# Altium PCB 2016ship.PcbDoc
Units mil, origin at the board's own origin, x right, y up, seen from the top; angles counter-clockwise.
Board outline 3217.54 x 3217.54 mil, 2 copper layers (Top Layer, Bottom Layer); 88 components, 45 nets, 223 pads, 58 vias.
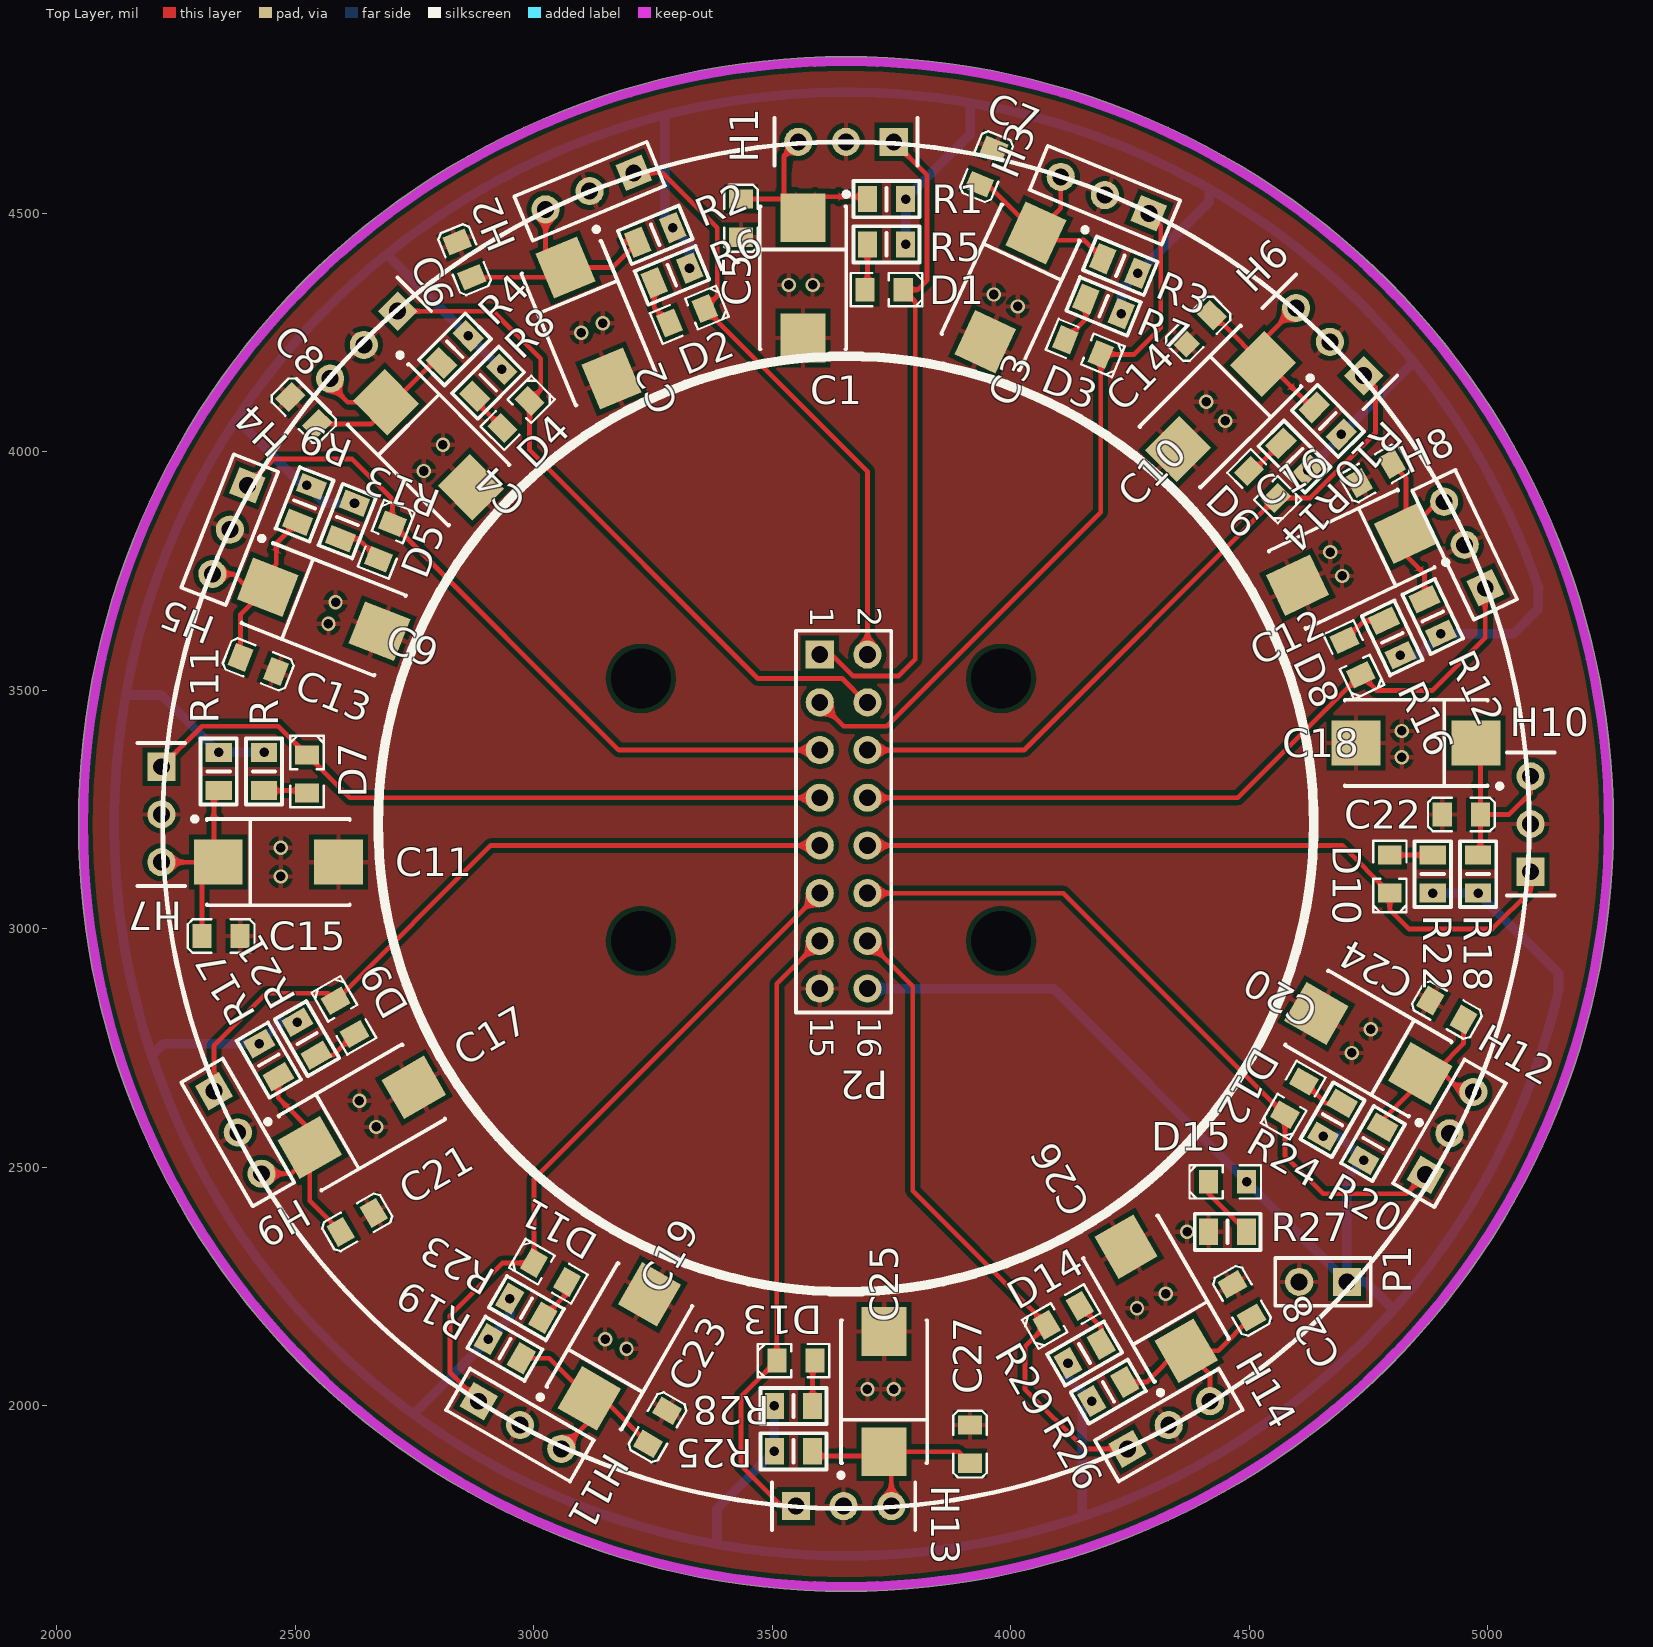
[diagram p0: Top Layer view]
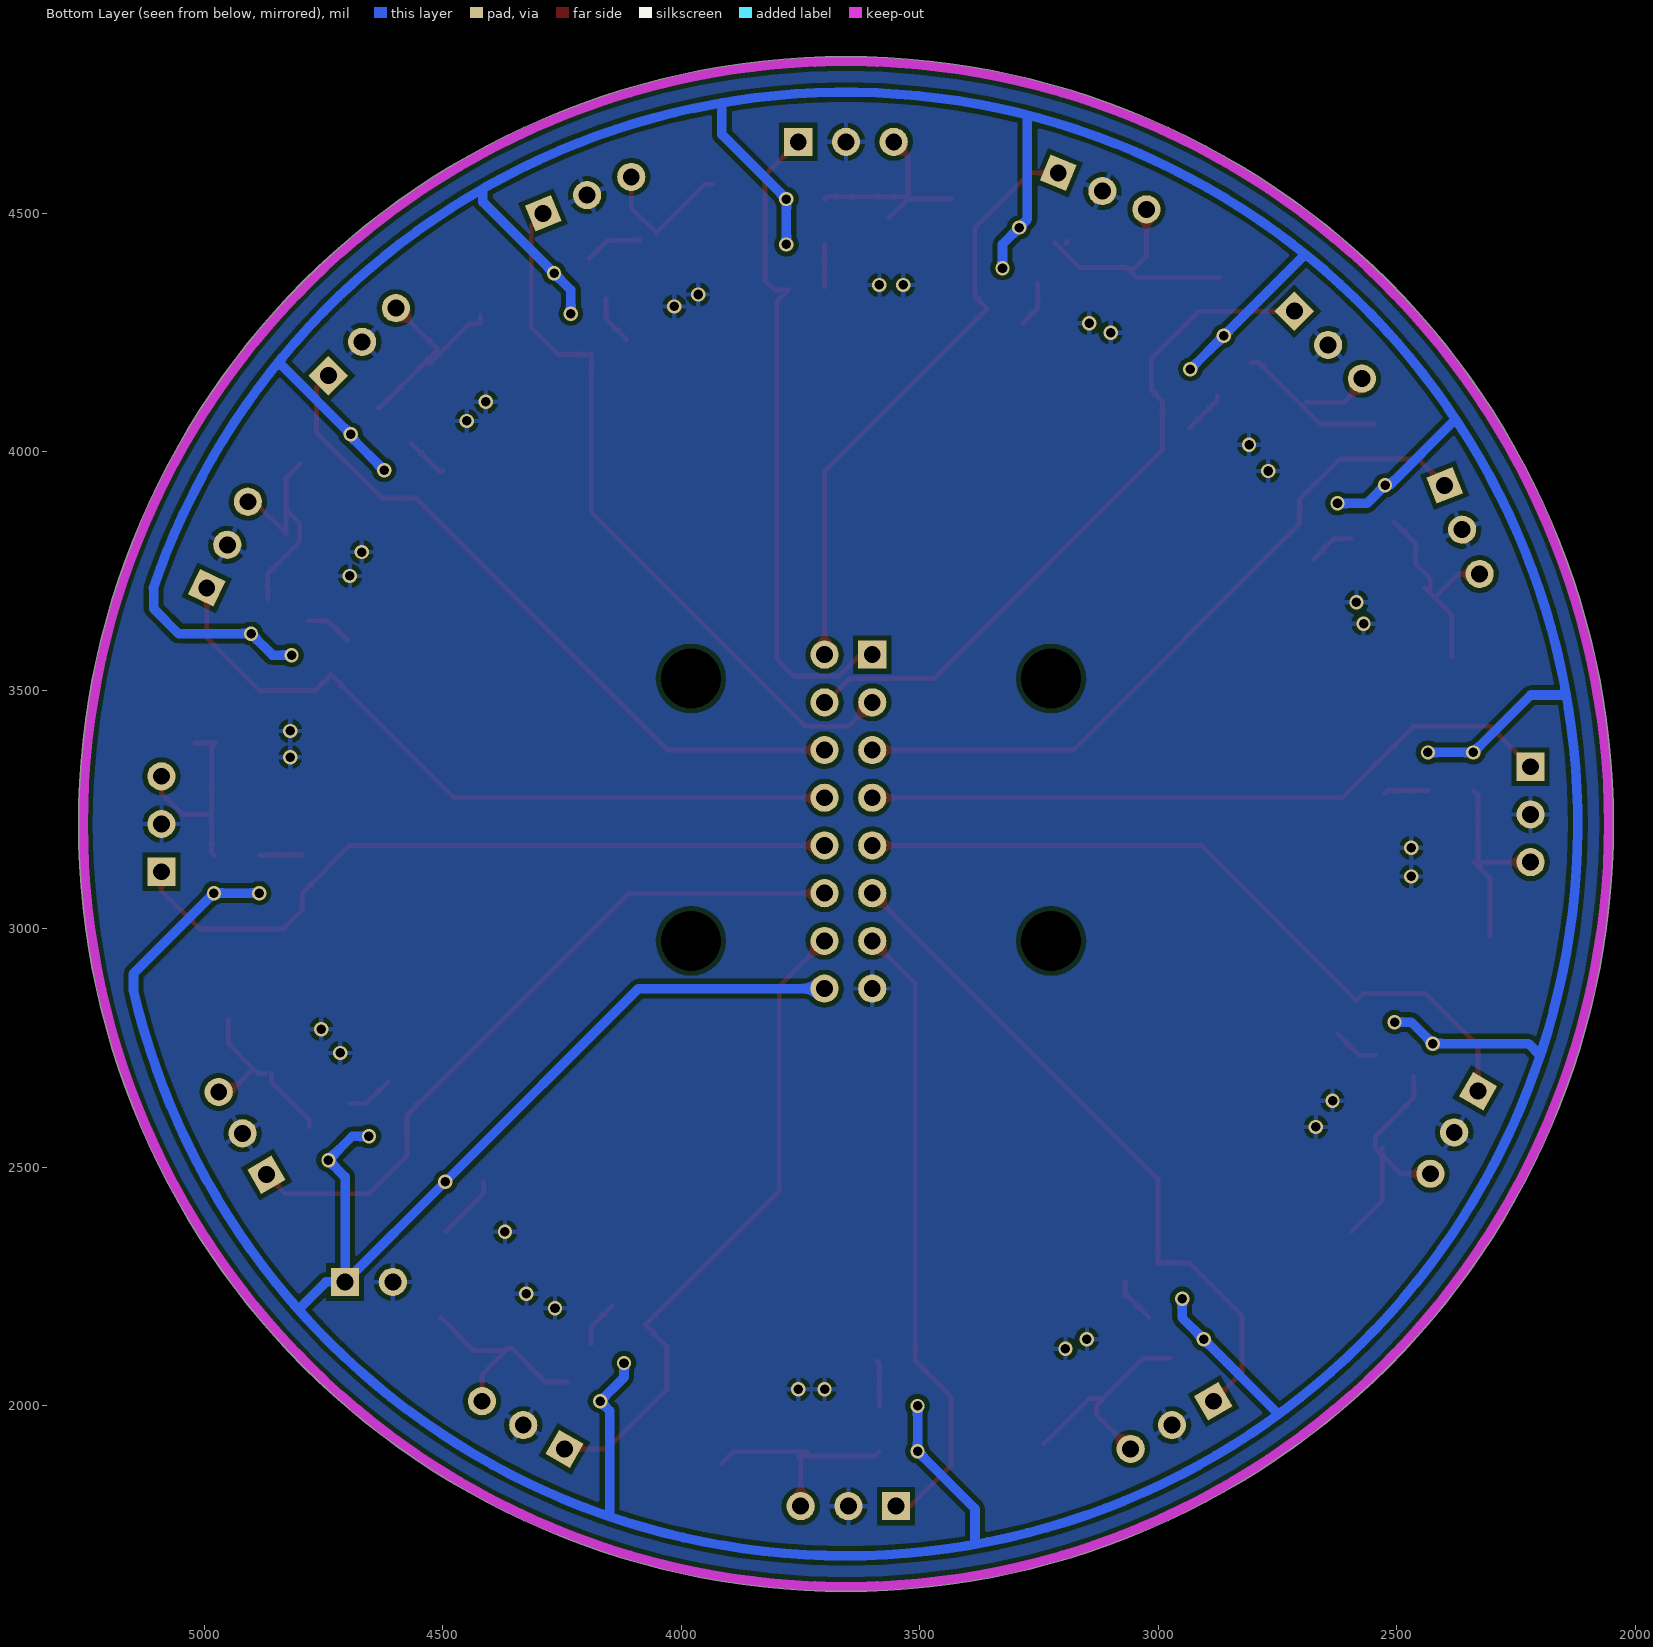
[diagram p1: Bottom Layer view, seen from below]

## Layer stack, top to bottom
Top Layer: signal copper 1.4
Dielectric: dielectric 12.6, FR-4, Dk 4.8
Bottom Layer: signal copper 1.4

## Board outline
2046.23,3220 ccw(c3655,3220) 3655,1611.23 ccw(c3655,3220) 5263.77,3220 ccw(c3655,3220) 3655,4828.77 ccw(c3655,3220)

## Design rules (kind name [scope] priority, off if disabled: settings)
Clearance [All] p1: gap=10
ComponentClearance [All] p1 off: gap=10 collisioncheckmode=3 verticalgap=10 showdistances=FALSE
PolygonConnect [All] p1: connectstyle=Relief reliefconductorwidth=10 reliefentries=4 polygonreliefangle="90 Angle" airgapwidth=10
RoutingVias [All] p1: holewidth=28 width=50 viastyle="Through Hole" minholewidth=28 minwidth=50 maxholewidth=28 maxwidth=50
SolderMaskExpansion [All] p1: expansion=4
Width [All] p1: maxlimit=100 minlimit=10 preferedwidth=10 minimp=50.000000 maximp=50.000000 favimp=50.000000
27 further rules are at their usual default settings.

## Components (designator, comment, footprint, x,y, rotation, side; value= is the part's Value field where it differs from the comment)
C1 "Cap Pol3" 7343 3565,4365 r270 top
C2 "Cap Pol3" 7343 3115,4270 r292.5 top
C3 "Cap Pol3" 7343 4000,4345 r245 top
C4 "Cap Pol3" 7343 2780,4015 r315 top
C5 "Cap" 0805c 3435,4450 r90 top
C6 "Cap" 0805c 2840,4440 r292.5 top
C7 "Cap" 0805c 3965,4635 r247.5 top
C8 "Cap" 0805c 2490,4115 r315 top
C9 "Cap Pol3" 7343 2560,3670 r338.5 top
C10 "Cap Pol3" 7343 4440,4095 r225 top
C11 "Cap Pol3" 7343 2465,3140 r0 top
C12 "Cap Pol3" 7343 4715,3775 r205.5 top
C13 "Cap" 0805c 2460,3540 r158.5 top
C14 "Cap" 0805c 4365,4230 r45 top
C15 "Cap" 0805c 2385,2985 r180 top
C16 "Cap" 0805c 4730,3935 r30 top
C17 "Cap Pol3" 7343 2640,2605 r30 top
C18 "Cap Pol3" 7343 4850,3390 r180 top
C19 "Cap Pol3" 7343 3180,2125 r60 top
C20 "Cap Pol3" 7343 4750,2760 r150 top
C21 "Cap" 0805c 2665,2405 r210 top
C22 "Cap" 0805c 4905,3240 r0 top
C23 "Cap" 0805c 3280,1990 r240 top
C24 "Cap" 0805c 4880,2850 r330 top
C25 "Cap Pol3" 7343 3735,2030 r90 top
C26 "Cap Pol3" 7343 4305,2225 r120 top
C27 "Cap" 0805c 3915,1960 r270 top
C28 "Cap" 0805c 4465,2255 r300 top
D1 "LED2" LED-0805 3695,4340 r0 top
D2 "LED2" LED-0805 3285,4270 r22.5 top
D3 "LED2" LED-0805 4115,4235 r337.5 top
D4 "LED2" LED-0805 2935,4050 r45 top
D5 "LED2" LED-0805 2675,3775 r68.5 top
D6 "LED2" LED-0805 4500,3960 r315 top
D7 "LED2" LED-0805 2525,3285 r90 top
D8 "LED2" LED-0805 4700,3605 r295.5 top
D9 "LED2" LED-0805 2625,2780 r120 top
D10 "LED2" LED-0805 4795,3155 r270 top
D11 "LED2" LED-0805 3070,2260 r150 top
D12 "LED2" LED-0805 4615,2680 r240 top
D13 "LED2" LED-0805 3590,2095 r180 top
D14 "LED2" LED-0805 4145,2210 r210 top
D15 "LED2" LED-0805 4495,2470 r180 top
H1 "Header 3" HDR1X3 3755,4650 r180 top
H2 "Header 3" HDR1X3 3210,4585 r202.5 top
H3 "Header 3" HDR1X3 4290,4500 r157.5 top
H4 "Header 3" HDR1X3 2715,4295 r225 top
H5 "Header 3" HDR1X3 2400,3930 r248.5 top
H6 "Header 3" HDR1X3 4740,4160 r135 top
H7 "Header 3" HDR1X3 2220,3340 r270 top
H8 "Header 3" HDR1X3 4995,3715 r115.5 top
H9 "Header 3" HDR1X3 2330,2660 r300 top
H10 "Header 3" HDR1X3 5090,3120 r90 top
H11 "Header 3" HDR1X3 2885,2010 r330 top
H12 "Header 3" HDR1X3 4870,2485 r60 top
H13 "Header 3" HDR1X3 3550,1790 r0 top
H14 "Header 3" HDR1X3 4245,1910 r30 top
P1 "Header 2" HDR1X2 4705,2260 r180 top
P2 "Header 8X2" HDR2X8 3600,3575 r270 top
R "Res1" 0805r 2435,3330 r90 top (schematic designator R15)
R1 "Res1" 0805r 3740,4530 r0 top
R2 "Res1" 0805r 3255,4455 r22.5 top
R3 "Res1" 0805r 4230,4390 r337.5 top
R4 "Res1" 0805r 2835,4215 r45 top
R5 "Res1" 0805r 3740,4435 r0 top
R6 "Res1" 0805r 3290,4370 r22.5 top
R7 "Res1" 0805r 4195,4305 r337.5 top
R8 "Res1" 0805r 2905,4145 r45 top
R9 "Res1" 0805r 2520,3890 r68.5 top
R10 "Res1" 0805r 4665,4065 r315 top
R11 "Res1" 0805r 2340,3330 r90 top
R12 "Res1" 0805r 4885,3655 r295.5 top
R13 "Res1" 0805r 2610,3855 r68.5 top
R14 "Res1" 0805r 4595,3990 r315 top
R16 "Res1" 0805r 4800,3610 r295.5 top
R17 "Res1" 0805r 2445,2725 r120 top
R18 "Res1" 0805r 4980,3115 r270 top
R19 "Res1" 0805r 2940,2120 r150 top
R20 "Res1" 0805r 4760,2550 r240 top
R21 "Res1" 0805r 2525,2770 r120 top
R22 "Res1" 0805r 4885,3115 r270 top
R23 "Res1" 0805r 2985,2205 r150 top
R24 "Res1" 0805r 4675,2600 r240 top
R25 "Res1" 0805r 3545,1905 r180 top
R26 "Res1" 0805r 4205,2030 r210 top
R27 "Res1" 0805r 4455,2365 r0 top
R28 "Res1" 0805r 3545,2000 r180 top
R29 "Res1" 0805r 4155,2110 r210 top

## Footprints (in the part's own frame and the unit in brackets; to place one, negate y for a bottom-side part, rotate by r counter-clockwise, add the part's x,y. Pads: shape width x height; smd on the part's side, far side on the other; paste and mask are expansions set on the pad)
0805c [mil]
  rect 40x50 smd: 1(0,0) 2(80,0)
  silkscreen extent -30,-35 110,35, body extent -7,-28 77,28, height 26
0805r [mil]
  rect 40x55 smd: 1(-40,0) 2(40,0)
  silkscreen extent -69,-38 69,38, body extent -42,-28 42,28, height 26
7343 [mm] "Capacitor, SM Tantalum; Body 7.3 x 4.3 mm (LxW typ)"
  rect 2.6x2.4 smd: 1(-3.2,0) 2(3.2,0)
  silkscreen extent -4.57,-2.3 3.8,2.43, body extent -3.73,-2.06 3.71,2.06, height 2.9
HDR1X2 [mm] "Connector; Header; 2 Position"
  rect 1.5x1.5 hole 0.9: 1(0,0)
  round 1.5 hole 0.9: 2(2.54,0)
  silkscreen extent -1.27,-1.27 3.81,1.27
HDR1X3 [mm] "Connector; Header; 3 Position"
  rect 1.5x1.5 hole 0.9: 1(0,0)
  round 1.5 hole 0.9: 2(2.54,0) 3(5.08,0)
  silkscreen extent -1.27,-1.27 6.35,1.27
HDR2X8 [mm] "Connector; Header; 8x2 Position"
  rect 1.5x1.5 hole 0.9: 1(0,0)
  round 1.5 hole 0.9: 2(0,2.54) 3(2.54,0) 4(2.54,2.54) 5(5.08,0) 6(5.08,2.54) 7(7.62,0) 8(7.62,2.54) 9(10.16,0) 10(10.16,2.54) 11(12.7,0) 12(12.7,2.54) 13(15.24,0) 14(15.24,2.54) 15(17.78,0) 16(17.78,2.54)
  silkscreen extent -1.27,-1.27 19.05,3.81
LED-0805 [mil]
  rect 40x50 smd: 1(0,0) 2(80,0)
  round 20 on Top Overlay: ""(110,0)
  silkscreen extent -30,-35 120,35

## Part data
C1 C2 C3 C4 C9 C10 C11 C12 C17 C18 C19 C20 C25 C26: "Polarized Capacitor (Surface Mount)"
C5 C6 C7 C8 C13 C14 C15 C16 C21 C22 C23 C24 C27 C28: "Capacitor"
D1 D2 D3 D4 D5 D6 D7 D8 D9 D10 D11 D12 D13 D14 D15: "Typical RED, GREEN, YELLOW, AMBER GaAs LED"
H1 H2 H3 H4 H5 H6 H7 H8 H9 H10 H11 H12 H13 H14: "Header, 3-Pin"
P1: "Header, 2-Pin"
P2: "Header, 8-Pin, Dual row"
R R1 R2 R3 R4 R5 R6 R7 R8 R9 R10 R11 R12 R13 R14 R16 R17 R18 R19 R20 R21 R22 R23 R24 R25 R26 R27 R28 R29: "Resistor"

## Free pads (board coordinates)
  round 0 hole 125.98: 0(3225,3525) 1(3225,2975) 2(3980,3525) 3(3980,2975)

## Via types
v1: diameter 30, hole 20, Top Layer to Bottom Layer, 58 vias

## Nets (pads, with @x,y where several pads share a name; then routed paths per layer and width w, separated by ;. In a path a pad name is that pad's centre, name@x,y a point inside that pad or via, vN(x,y) a via of type N, cw(c..) or ccw(c..) an arc to the next point about the centre after c; other vN are vias at no path point)
+5V: D15.1 P1.1 P2.16 R1.2 R2.2 R3.2 R4.2 R5.2 R6.2 R7.2 R8.2 R9.2 R10.2 R11.2 R12.2 R13.2 R14.2 R16.2 R17.2 R18.2 R19.2 R20.2 R21.2 R22.2 R23.2 R24.2 R25.2 R26.2 R28.2 R29.2 R.2 | length 15014.2
  Bottom Layer w20: 2145.17,3490.44 2219.56,3490.44 v1(2340,3370) v1(2435,3370) ; 2199.85,2734.95 2224.54,2759.64 v1(2425,2759.64) 2470,2804.64 v1(2505,2804.64) ; 2377.22,4068.53 2515.75,3930 v1(2525,3930) 2562.78,3892.22 v1(2624.66,3892.22) ; 2692.94,4414.64 2692.94,4413.63 v1(2863.28,4243.28) v1(2933.28,4173.28) ; 2750.07,1981.53 2750.07,1984.71 v1(2905.36,2140) 2950.36,2185 v1(2950.36,2225) ; 3274.75,4705.98 3274.75,4487.51 v1(3291.96,4470.31) 3326.96,4435.31 v1(3326.96,4385.31) ; 3384.56,1710.17 3384.56,1784.56 v1(3505,1905) v1(3505,2000) ; P2.16 4090,2875 v1(4495,2470) P1.1 ; v1(3780,4435) v1(3780,4530) 3915.28,4665.28 3915.28,4731.62 ; v1(4120.36,2090) 4120.36,2060 v1(4170.36,2010) 4150.45,1990.09 4150.45,1768.36 ; v1(4231.96,4289.69) 4231.96,4339.69 v1(4266.96,4374.69) 4416.01,4523.74 4416.01,4551.76 ; v1(4623.28,3961.72) 4693.28,4031.72 v1(4693.28,4036.72) 4838.63,4182.06 4849.64,4182.06 ; v1(4655,2565.36) 4690,2565.36 v1(4740,2515.36) 4705,2480.36 P1.1 ; 4792.24,2190.44 ccw(c3655,3220) 4802.95,2202.39 ; 4810.04,2210.44 cw(c3655,3220) 4802.95,2202.39 ; v1(4817.22,3573.9) 4857.22,3573.9 v1(4902.22,3618.9) 5053.9,3618.9 5106.64,3671.64 5106.64,3715.45 ; v1(4885,3075) v1(4980,3075) 5148.61,2906.39 5148.61,2870.91 ; 5106.82,3715.51 ccw(c3655,3220) 5148.8,2870.87 ; P1.1 4745.33,2260 4802.95,2202.39
GND: C1.2 C2.2 C3.2 C4.2 C5.1 C6.1 C7.1 C8.1 C9.2 C10.2 C11.2 C12.2 C13.1 C14.1 C15.1 C16.1 C17.2 C18.2 C19.2 C20.2 C21.1 C22.1 C23.1 C24.1 C25.2 C26.2 C27.1 C28.1 H1.2 H2.2 H3.2 H4.2 H5.2 H6.2 H7.2 H8.2 H9.2 H10.2 H11.2 H12.2 H13.2 H14.2 P1.2 P2.15 R27.1
  other v1: 3700,2035 3755,2035 3195,2120 3150,2140 4265,2205 4325,2235 4370,2365 2670,2585 2635,2640 4715,2740 4755,2790 2470,3110 2470,3170 4820,3360 4820,3415 2570,3640 2585,3685 4695,3740 4670,3790 2770,3960 2810,4015 4450,4065 4410,4105 3100,4250 3145,4270 4015,4305 3965,4330 3535,4350 3585,4350
NetC1_1: C1.1 C5.2 H1.3 R1.1 | length 450.7
  Top Layer w10: C5.2 3525.98,4530 C1.1 ; H1.3 3525,4620 3525,4535 3695,4535 R1.1
NetC2_1: C2.1 C6.2 H2.3 R2.1 | length 527
  Top Layer w10: C6.2 3046.48,4366.09 C2.1@3065.39,4385 ; H2.3 3025.22,4409.78 3050,4385 C2.1@3065.39,4385 ; R2.1 3164.75,4386.39 C2.1 C2.1@3065.39,4385
NetC3_1: C3.1 C7.2 H3.3 R3.1 | length 419.5
  Top Layer w10: C7.2 3951.33,4561.09 C3.1 4105.22,4511.16 H3.3 ; C3.1@4089.47,4443.91 4154.44,4443.91 R3.1
NetC4_1: C4.1 C8.2 H4.3 R4.1 | length 458.5
  Top Layer w10: C8.2 2659.71,4058.43 2660,4058.14 2788.58,4186.72 R4.1 ; H4.3 2573.58,4141.42 2610.92,4104.08 C4.1
NetC9_1: C9.1 C13.2 H5.3 R9.1 | length 465.9
  Top Layer w10: H5.3 2371.08,3743.92 C9.1@2420.8,3694.2 ; C13.2 2385.57,3658.96 C9.1@2420.8,3694.2 ; C9.1 C9.1@2430,3703.39 ; R9.1 2460.57,3808.01 2460.57,3764.32 2430,3733.75 C9.1@2430,3703.39 ; C9.1@2420.8,3694.2 C9.1@2430,3703.39
NetC10_1: C10.1 C14.2 H6.3 R10.1 | length 460.8
  Top Layer w10: C14.2 4421.57,4268.43 4444.74,4268.43 C10.1 ; H6.3 4596.42,4301.42 4511.57,4216.57 4511.57,4213.43 4631.72,4093.28 R10.1
NetC11_1: C11.1 C15.2 H7.3 R11.1 | length 447.4
  Top Layer w10: H7.3 2320,3140 2329.51,3130.49 2330,3130 C11.1@2330,3130.98 ; C15.2 2305,3105.98 C11.1@2330,3130.98 ; C11.1 C11.1@2330,3130.98 ; R11.1 2330,3280 C11.1@2330,3130.98
NetC12_1: C12.1 C16.2 H8.3 R12.1 | length 493.2
  Top Layer w10: C16.2 4828.71,3945.57 C12.1@4828.71,3878.71 ; R12.1 4867.78,3743.87 4800,3811.65 4800,3850 C12.1@4828.71,3878.71 ; H8.3 4894.99,3895.52 C12.1 C12.1@4828.71,3878.71
NetC17_1: C17.1 C21.2 H9.3 R17.1 | length 524.4
  Top Layer w10: H9.3 2491.79,2486.79 C17.1@2530.89,2525.89 ; R17.1 2465,2645.72 2545,2565.72 2545,2540 C17.1@2530.89,2525.89 ; C17.1 C17.1@2530.89,2525.89 ; C21.2 2530.89,2429.82 C17.1@2530.89,2525.89
NetC18_1: C18.1 C22.2 H10.3 R18.1 | length 443.5
  Top Layer w10: R18.1 4985,3160 C22.2 ; C18.1@5020,3390 C18.1 4985,3380.98 C22.2 ; H10.3 5090,3285 5045,3240 C22.2
NetC19_1: C19.1 C23.2 H11.3 R19.1 | length 479.8
  Top Layer w10: R19.1 3032.9,2100 C19.1 3144.82,2015.89 C23.2 ; H11.3 3130,1981.79 3130,2000 C19.1@3115.56,2014.44
NetC20_1: C20.1 C24.2 H12.3 R20.1 | length 392
  Top Layer w10: R20.1 4780,2600 4859.11,2679.11 C20.1 ; C20.1@4872.01,2697.01 4887.01,2697.01 C20.1@4897.14,2707.14 ; C24.2 4949.28,2759.28 C20.1@4897.14,2707.14 ; H12.3 4946.08,2658.21 C20.1@4897.14,2707.14
NetC25_1: C25.1 C27.2 H13.3 R25.1 | length 471.2
  Top Layer w10: R25.1 3595,1895 3755,1895 3750,1890 H13.3 ; C25.1 3890.98,1904.02 C27.2
NetC26_1: C26.1 C28.2 H14.3 R26.1 | length 450.3
  Top Layer w10: R26.1 4285,2050 4355.72,2120.72 C26.1@4367.99,2120.72 ; H14.3 4418.21,2065.68 C26.1 4435.18,2115.89 C28.2
NetD1_1: D1.1 R5.1 | length 90
  Top Layer w10: D1.1@3700,4345 R5.1
NetD2_1: D2.1 R6.1 | length 97.9
  Top Layer w10: R6.1 3253.04,4301.96 D2.1
NetD3_1: D3.1 R7.1 | length 103.1
  Top Layer w10: D3.1 4158.04,4278.04 R7.1
NetD4_1: D4.1 R8.1 | length 90.9
  Top Layer w10: R8.1 2876.72,4108.28 D4.1
NetD5_1: D5.1 R13.1 | length 97.4
  Top Layer w10: R13.1 2632.22,3817.78 D5.1
NetD6_1: D6.1 R14.1 | length 90.9
  Top Layer w10: D6.1 4508.43,3960 R14.1
NetD7_1: D7.1 R.1 | length 92.1
  Top Layer w10: R.1 2520,3290 D7.1
NetD8_1: D8.1 R16.1 | length 99.8
  Top Layer w10: D8.1 4741.1,3646.1 R16.1
NetD9_1: D9.1 R21.1 | length 98.5
  Top Layer w10: R21.1 2580.36,2735.36 D9.1
NetD10_1: D10.1 R22.1 | length 90
  Top Layer w10: D10.1 R22.1
NetD11_1: D11.1 R23.1 | length 95.9
  Top Layer w10: R23.1 3070,2235.36 D11.1
NetD12_1: D12.1 R24.1 | length 98.8
  Top Layer w10: D12.1 4660.36,2634.64 R24.1
NetD13_1: D13.1 R28.1 | length 97.1
  Top Layer w10: R28.1 3585,2090 D13.1
NetD14_1: D14.1 R29.1 | length 98.5
  Top Layer w10: D14.1 4189.64,2165.36 R29.1
NetD15_2: D15.2 R27.2 | length 138.1
  Top Layer w10: D15.2 4415,2445 R27.2
OUT1: D1.2 H1.1 P2.1 | length 1395.8
  Top Layer w10: P2.1 3625,3575 3670,3530 3765,3530 3800,3565 3800,4315 D1.2 3805,4340 3825,4360 3825,4580 H1.1
OUT2: D2.2 H2.1 P2.2 | length 1269.7
  Top Layer w10: H2.1 3270,4585 3385,4470 3385,4326.7 D2.2 3700,3959.53 P2.2
OUT3: D3.2 H3.1 P2.3 | length 1525.5
  Top Layer w10: P2.3 3650,3425 3740,3425 4188.91,3873.91 D3.2 4259.39,4204.39 4315,4260 4315,4475 H3.1
OUT4: D4.2 H4.1 P2.4 | length 1470
  Top Layer w10: H4.1 2915,4295 3015,4195 3015,4130 D4.2 2991.57,4003.43 3470,3525 3646.72,3525 3696.72,3475 P2.4
OUT5: D5.2 H5.1 P2.5 | length 1505.5
  Top Layer w10: H5.1 2455,3985 2620,3985 2704.32,3900.68 D5.2 3178.75,3375 P2.5
OUT6: D6.2 H6.1 P2.6 | length 1470.8
  Top Layer w10: P2.6 4028.14,3375 D6.2 4628.43,3903.43 4765,4040 4765,4135 H6.1
OUT7: D7.2 H7.1 P2.7 | length 1477.3
  Top Layer w10: H7.1 2305,3425 2465,3425 D7.2 2615,3275 P2.7
OUT8: D8.2 H8.1 P2.8 | length 1565.9
  Top Layer w10: P2.8 4476.65,3275 D8.2 4767.23,3500 4885,3500 4995,3610 H8.1
OUT9: D9.2 H9.1 P2.9 | length 1552
  Top Layer w10: H9.1 2330,2755 2440,2865 2569.28,2865 D9.2 2910.72,3175 P2.9
OUT10: D10.2 H10.1 P2.10 | length 1556.1
  Top Layer w10: P2.10 4695,3175 D10.2 4795,3040 4835,3000 5010,3000 5090,3080 H10.1
OUT11: D11.2 H11.1 P2.11 | length 1449.4
  Top Layer w10: H11.1 2825,2070 2825,2190 2935,2300 D11.2 3000.72,2475.72 P2.11
OUT12: D12.2 H12.1 P2.12 | length 1497.7
  Top Layer w10: P2.12 4110.72,3075 D12.2 4575,2525 4655,2445 4830,2445 H12.1
OUT13: D13.2 H13.1 P2.13 | length 1318.6
  Top Layer w10: H13.1 3520,1790 3435,1875 3435,2020 D13.2 3510,2885 P2.13
OUT14: D14.2 H14.1 P2.14 | length 1381.3
  Top Layer w10: P2.14 3795,2880 3795,2450.72 D14.2 4030,2124.28 4030,2035 4155,1910 H14.1
pads on no net: D1. D2. D3. D4. D5. D6. D7. D8. D9. D10. D11. D12. D13. D14. D15.

## Polygon pours and split planes (outlines as drawn)
GND on Bottom Layer "Keep-Out Layer-No Net" (solid, remove dead copper, pour order 5): 1435,5085 1530,4990 1530,1235 5840,1235 6270,1665 6045,1890 6045,5110
GND on Top Layer "Keep-Out Layer-No Net" (solid, remove dead copper, pour order 9): 2045,5170 2045,1835 1510,1300 1595,1385 6410,1385 6410,4980 6400,4990

## Keep-outs
Keep-Out Layer:
  circle w20: c3655,3220 r1598.76

## Silkscreen, mask and mechanical layers (free items; w line width, h text height)
Top Overlay:
  circle w10: c3655,3217.5 r1432.5
  circle w20: c3655,3220 r980.57

## Text inside footprints (layer, text, board x,y; h text height)
P2: Top Overlay "16" at 3680,2815 h50 r270; Top Overlay "15" at 3580,2815 h50 r270; Top Overlay "1" at 3580,3675 h50 r270; Top Overlay "2" at 3680,3675 h50 r270